# Altium PCB HUZZAH32.PcbDoc (part 2 of 2)
Units mm, origin at the board's own origin, x right, y up, seen from the top; angles counter-clockwise.
Board outline 50.95 x 23.01 mm, 2 copper layers (Top Layer, Bottom Layer); 30 components, 43 nets, 184 pads, 134 vias.
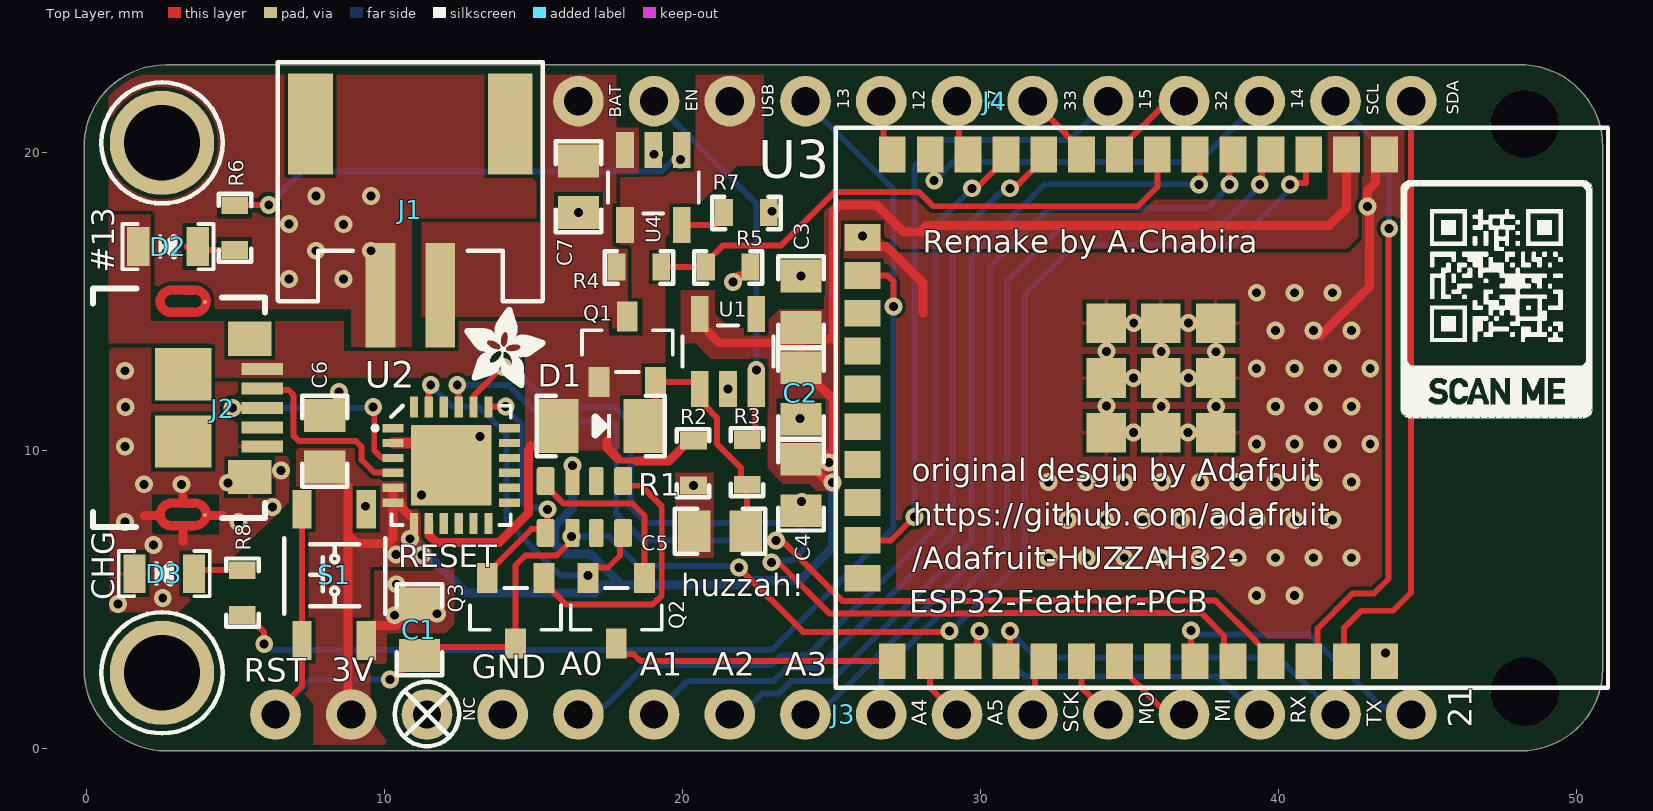
[diagram p0: Top Layer view]

## Silkscreen, mask and mechanical layers (free items; w line width, h text height) (continued)
Manufacturing Notes (M2): (continued)
  text "Minimum Gap: 127um" at 69.4,85.02 h1.52
  text "*.GTO - Top Overlay ok" at 0.254,84.98 h1.52
  text "Minimum Through Hole VIA: 0.6mm (pad) / 0.3mm (drill). Drilling: L1-L2" at 69.4,82.52 h1.52
  text "*.GTP - Top Paste ok" at 0.254,82.48 h1.52
  text "*.GTS - Top Solder ok" at 0.254,79.98 h1.52
  text "1. FINISHED PANEL THICKNESS IS NOT CRITICAL: TO BE APPROXIMATELY 1.6mm" at 69.4,77.52 h1.52
  text "*.GTL - L1 (Positive) ok" at 0.254,77.48 h1.52
  text "*.GBL - L2 (Positive) ok" at 0.254,74.98 h1.52
  text "2. BOARD FINISH:  IS NOTE CRITICAL" at 69.4,72.52 h1.52
  text "*.GBS - Bottom Solder ok" at 0.254,72.48 h1.52
  text "*.GBO - Bottom Overlay ok" at 0.254,69.98 h1.52
  text "3. SOLDER RESIST: APPLY TO BOTH SIDES COLOUR - BLACK" at 69.4,67.52 h1.52
  text "*.GM1 - Board Outline ok" at 0.254,67.48 h1.52
  text "*.GM2 - Manufacturing Notes ok" at 0.254,64.98 h1.52
  text "4. COMPONENT IDENT: COLOUR TO BE WHITE" at 69.4,62.52 h1.52
  text "*.GM11 - Board Dimensions ok" at 0.254,62.23 h1.52
  text "Huzzah32 Feather" at 5,-32.2 h3
  text "Rev1.0" at 77,-32.2 h3
  text "Copyright" at 4.5,-39.7 h1.52
  text "Remake by A.Chabira" at 44.5,-39.7 h1.52
  text "Adafruit" at 4.5,-42.2 h1.52
  text "github.com/ghanku" at 44.5,-42.2 h1.52
  text "Contact:" at 4.5,-49.7 h1.52
  text "chabiraghanou45@gmail.com" at 19.5,-49.7 h1.52
Dimensions (M11) (Mech11):
  circle w0.406: c2.54,2.54 r1.27
  circle w0.406: c2.54,20.32 r1.27
  circle w0.406: c48.26,20.955 r1.143
  circle w0.406: c48.26,1.905 r1.143
  text "Units: mils" at 52.94,31.82 h2.03
  text "Scale: 1:1" at 52.94,26.82 h2.03

## Dimensions
48.26,1.905 to 48.26,20.955 on Dimensions (M11) (Mech11)
48.26,20.955 to 2.54,20.32 on Dimensions (M11) (Mech11)
16.51,21.717 to -0.075,2.681 on Dimensions (M11) (Mech11)
9.874,15.205 to 0,22.86 on Dimensions (M11) (Mech11)
5.96,11.431 to 0.059,0.001 on Dimensions (M11) (Mech11)
3.81,2.54 to 1.27,2.54 on Dimensions (M11) (Mech11)
44.45,-1.143 to 0,0 on Dimensions (M11) (Mech11)
47.117,1.905 to 49.403,1.905 on Dimensions (M11) (Mech11)
48.26,22.86 to 48.133,0 on Dimensions (M11) (Mech11)
50.8,20.193 to 0,20.32 on Dimensions (M11) (Mech11)

## Text inside footprints (layer, text, board x,y; h text height)
U3: Assembly (M29) "ANTENNA" at 47.293,17.43 h1.78 r270